# Altium PCB Sinistro_ASP_RevA.PcbDoc (part 5 of 5)
Units mm, origin at the board's own origin, x right, y up, seen from the top; angles counter-clockwise.
Board outline 150 x 110 mm, 8 copper layers (Top Layer (.GTL), MidLayer1 (.G1), +28V and VCC (.GP1), A and D grounds (.GP2), Earth GND (.GP3), +5ANA (.GP4), -5ANA (.GP5), Bottom Layer (.GBL)); 383 components, 275 nets, 1751 pads, 521 vias.
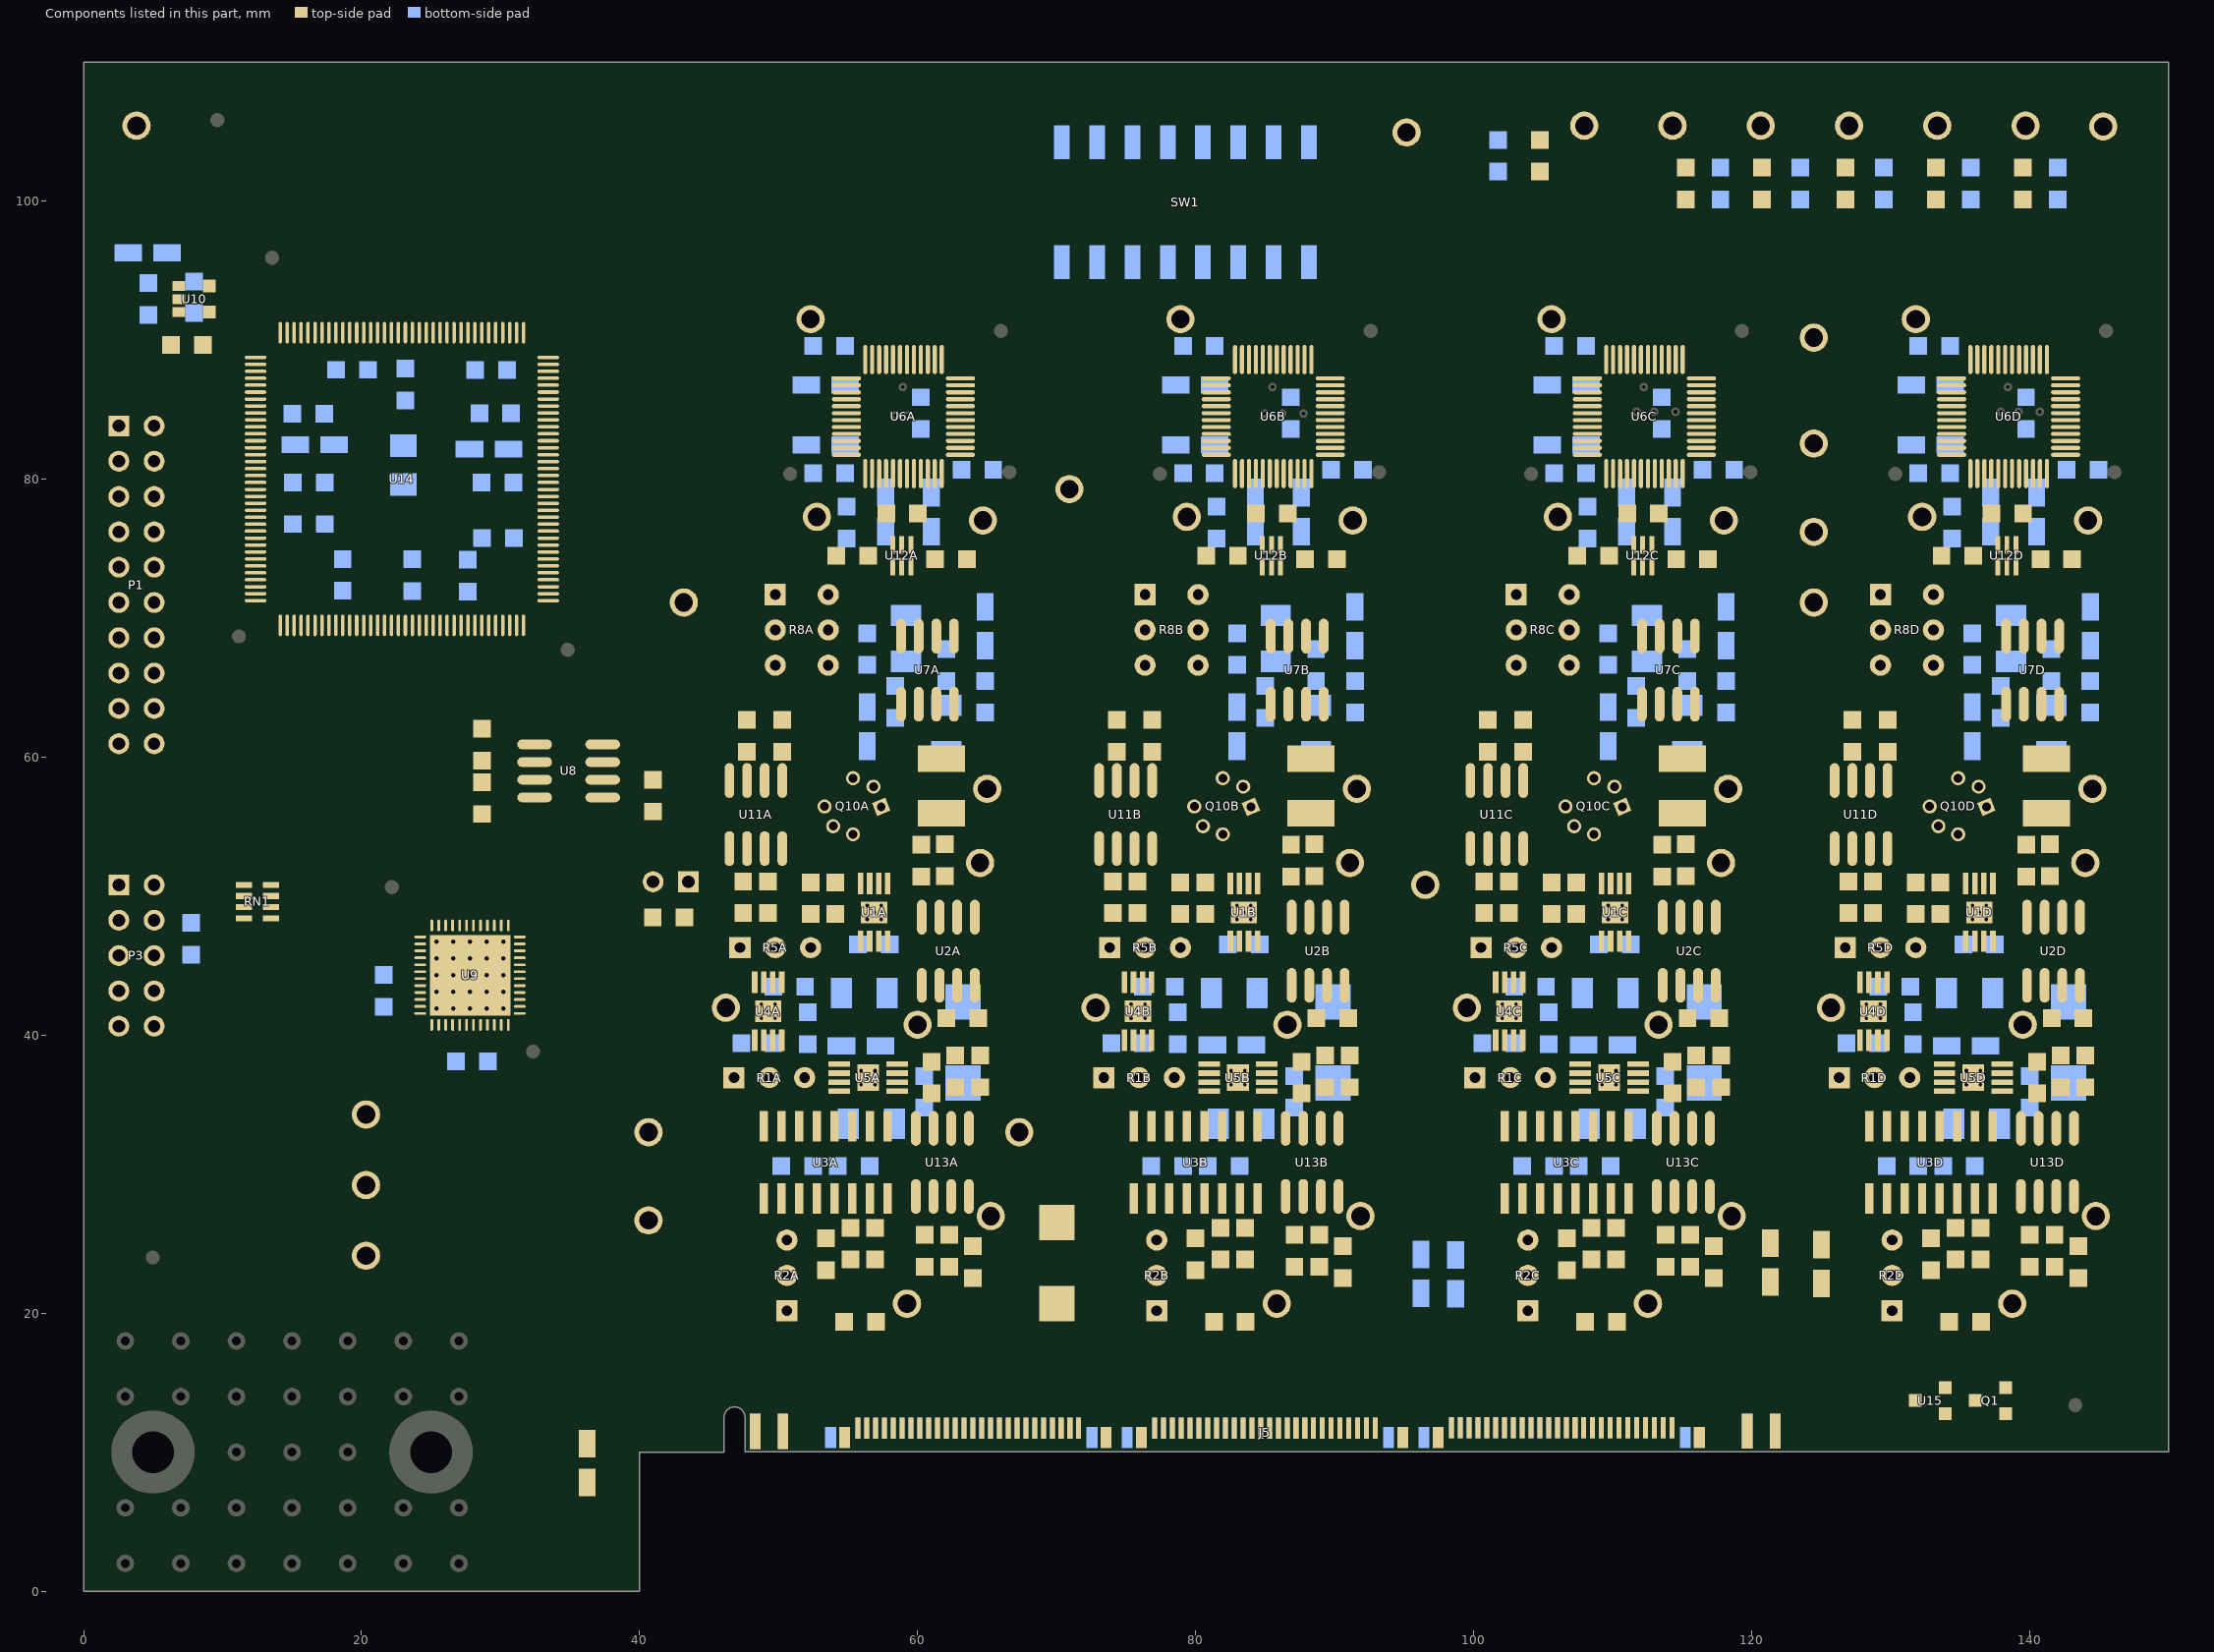
[diagram p11: the components of this part, seen from the top]

## Polygon pours and split planes (outlines as drawn)
E on Top Layer (.GTL) "Mechanical 13-No Net" (solid, pour order 1003): 135.888,87.122 135.888,81.915 141.056,81.915 141.174,82.032 141.023,82.183 141.023,87.056
E on Top Layer (.GTL) "Mechanical 13-No Net" (solid, pour order 1002): 109.688,87.122 109.688,81.915 114.856,81.915 114.974,82.032 114.823,82.183 114.823,87.056
E on Top Layer (.GTL) "Mechanical 13-No Net" (solid, pour order 1001): 82.988,87.122 82.988,81.915 88.156,81.915 88.274,82.032 88.123,82.183 88.123,87.056
E on Top Layer (.GTL) "Mechanical 13-No Net" (solid, pour order 1000): 56.388,87.122 56.388,81.915 61.556,81.915 61.674,82.032 61.523,82.183 61.523,87.056
no net on Top Solder "Mechanical 13-No Net" (solid): 56.39,87.122 56.39,81.788 61.724,81.788 61.724,87.122
no net on Top Solder "Mechanical 13-No Net" (solid): 82.99,87.122 82.99,81.788 88.324,81.788 88.324,87.122
no net on Top Solder "Mechanical 13-No Net" (solid): 109.69,87.122 109.69,81.788 115.024,81.788 115.024,87.122
E on Top Solder "Mechanical 13-No Net" (solid): 135.89,87.122 135.89,81.788 141.224,81.788 141.224,87.122
+28V on +28V and VCC (.GP1) (split plane): 149.298,50.677 149.438,50.654 149.49,50.651 149.49,10.531 48.237,10.531 48.237,50.696 149.232,50.696
VCC on +28V and VCC (.GP1) (split plane): 149.49,53.24 46.965,53.24 46.822,53.232 46.682,53.209 46.544,53.169 46.413,53.114 46.288,53.045 46.172,52.963 46.065,52.868 45.97,52.761 45.888,52.645 45.819,52.52 45.764,52.389 45.724,52.251 45.701,52.111 45.693,51.968 45.693,13.043 45.64,12.916 45.601,12.78 45.577,12.641 45.57,12.511 45.569,12.5 45.569,10.51 40,10.51 39.9,10.501 39.805,10.472 39.716,10.424 39.639,10.361 39.576,10.284 39.528,10.195 39.499,10.1 39.49,10 39.49,0.51 0.51,0.51 0.51,109.49 149.49,109.49
A on A and D grounds (.GP2) (split plane): 149.49,18.442 42.648,18.442 42.648,53.467 42.641,53.542 42.619,53.614 42.584,53.68 42.536,53.738 42.508,53.761 42.486,53.789 42.427,53.836 42.361,53.872 42.289,53.893 42.215,53.901 24.792,53.901 24.792,65.149 42.316,65.149 42.391,65.157 42.463,65.178 42.529,65.214 42.587,65.261 42.633,65.317 42.689,65.363 42.736,65.421 42.772,65.487 42.793,65.559 42.801,65.634 42.801,109.169 42.793,109.244 42.772,109.316 42.736,109.382 42.689,109.44 42.631,109.488 42.627,109.49 149.49,109.49
GND on A and D grounds (.GP2) (split plane): 42.205,109.488 42.147,109.44 42.1,109.382 42.064,109.316 42.043,109.244 42.035,109.169 42.035,65.915 24.46,65.915 24.386,65.907 24.314,65.886 24.248,65.85 24.189,65.803 24.167,65.775 24.139,65.752 24.091,65.694 24.056,65.628 24.034,65.556 24.027,65.481 24.027,53.569 24.034,53.494 24.056,53.422 24.091,53.356 24.139,53.298 24.167,53.275 24.189,53.247 24.248,53.199 24.314,53.164 24.386,53.142 24.46,53.135 41.883,53.135 41.883,18.059 41.89,17.985 41.912,17.913 41.947,17.847 41.995,17.789 42.053,17.741 42.119,17.706 42.191,17.684 42.266,17.677 149.49,17.677 149.49,10.531 48.09,10.531 48.09,12.5 48.089,12.511 48.082,12.641 48.058,12.78 48.019,12.916 47.965,13.047 47.896,13.17 47.815,13.286 47.72,13.391 47.615,13.485 47.5,13.567 47.376,13.635 47.246,13.689 47.11,13.728 46.971,13.752 46.829,13.76 46.688,13.752 46.549,13.728 46.413,13.689 46.283,13.635 46.159,13.567 46.044,13.485 45.938,13.391 45.844,13.286 45.763,13.17 45.694,13.047 45.64,12.916 45.601,12.78 45.577,12.641 45.57,12.511 45.569,12.5 45.569,10.51 40,10.51 39.9,10.501 39.805,10.472 39.716,10.424 39.639,10.361 39.576,10.284 39.528,10.195 39.499,10.1 39.49,10 39.49,0.51 0.51,0.51 0.51,109.49 42.209,109.49
E on Earth GND (.GP3) (split plane): 149.49,10.531 48.09,10.531 48.09,12.5 48.089,12.511 48.082,12.641 48.058,12.78 48.019,12.916 47.965,13.047 47.896,13.17 47.815,13.286 47.72,13.391 47.615,13.485 47.5,13.567 47.376,13.635 47.246,13.689 47.11,13.728 46.971,13.752 46.829,13.76 46.688,13.752 46.549,13.728 46.413,13.689 46.283,13.635 46.159,13.567 46.044,13.485 45.938,13.391 45.844,13.286 45.763,13.17 45.694,13.047 45.64,12.916 45.601,12.78 45.577,12.641 45.57,12.511 45.569,12.5 45.569,10.51 40,10.51 39.9,10.501 39.805,10.472 39.716,10.424 39.639,10.361 39.576,10.284 39.528,10.195 39.499,10.1 39.49,10 39.49,0.51 0.51,0.51 0.51,109.49 149.49,109.49
+5ANA on +5ANA (.GP4) (split plane): 149.49,10.531 48.09,10.531 48.09,12.5 48.089,12.511 48.082,12.641 48.058,12.78 48.019,12.916 47.965,13.047 47.896,13.17 47.815,13.286 47.72,13.391 47.615,13.485 47.5,13.567 47.376,13.635 47.246,13.689 47.11,13.728 46.971,13.752 46.829,13.76 46.688,13.752 46.549,13.728 46.413,13.689 46.283,13.635 46.159,13.567 46.044,13.485 45.938,13.391 45.844,13.286 45.763,13.17 45.694,13.047 45.64,12.916 45.601,12.78 45.577,12.641 45.57,12.511 45.569,12.5 45.569,10.51 40,10.51 39.9,10.501 39.805,10.472 39.716,10.424 39.639,10.361 39.576,10.284 39.528,10.195 39.499,10.1 39.49,10 39.49,0.51 0.51,0.51 0.51,109.49 149.49,109.49
-5ANA on -5ANA (.GP5) (split plane): 149.49,10.531 48.09,10.531 48.09,12.5 48.089,12.511 48.082,12.641 48.058,12.78 48.019,12.916 47.965,13.047 47.896,13.17 47.815,13.286 47.72,13.391 47.615,13.485 47.5,13.567 47.376,13.635 47.246,13.689 47.11,13.728 46.971,13.752 46.829,13.76 46.688,13.752 46.549,13.728 46.413,13.689 46.283,13.635 46.159,13.567 46.044,13.485 45.938,13.391 45.844,13.286 45.763,13.17 45.694,13.047 45.64,12.916 45.601,12.78 45.577,12.641 45.57,12.511 45.569,12.5 45.569,10.51 40,10.51 39.9,10.501 39.805,10.472 39.716,10.424 39.639,10.361 39.576,10.284 39.528,10.195 39.499,10.1 39.49,10 39.49,0.51 0.51,0.51 0.51,109.49 149.49,109.49

## Other copper
Top Layer (.GTL):
  rectangle net E: 0,0 30,20
  text "*.GTL - TOP LAYER GERBER DATA" at 27.94,-41.148 h2.03
MidLayer1 (.G1):
  text "*.G1 - MID LAYER 1 GERBER DATA" at 27.94,-45.972 h2.03
Bottom Layer (.GBL):
  region net E: 30,20 0,20 0,0 30,0
  text "SINISTRO ASP BOARD Rev.A" at 63.8,107.6 h0.76
  text "Las Cumbres Observatory" at 63.5,106 h0.76
  text "*.GBL - BOTTOM LAYER GERBER DATA" at 27.94,-74.916 h2.03
A and D grounds (.GP2) (plane layer: these items are gaps in the copper):
  lines w0.762: 24.409,53.569 24.409,65.481 ; 24.46,53.518 42.215,53.518 ; 24.46,65.532 42.316,65.532 ; 42.266,53.467 42.266,18.059 149.924,18.059 ; 42.418,65.634 42.418,109.169
  text "*.GP2 - INTERNAL PLANE LAYER 2 GERBER DATA" at 27.94,-55.62 h2.03
+5ANA (.GP4) (plane layer: these items are gaps in the copper):
  text "*.GP4 - INTERNAL PLANE LAYER 4 GERBER DATA" at 27.94,-65.268 h2.03
-5ANA (.GP5) (plane layer: these items are gaps in the copper):
  text "*.GP5 - INTERNAL PLANE LAYER 5 GERBER DATA" at 27.94,-70.092 h2.03
+28V and VCC (.GP1) (plane layer: these items are gaps in the copper):
  lines w2.54: 46.965,10.16 46.965,51.968 141.808,51.968 149.53,51.968 149.581,51.918
  text "*.GP1- INTERNAL PLANE LAYER 1 GERBER DATA" at 27.94,-50.796 h2.03
Earth GND (.GP3) (plane layer: these items are gaps in the copper):
  text "*.GP3- INTERNAL PLANE LAYER 3 GERBER DATA" at 27.94,-60.444 h2.03

## Silkscreen, mask and mechanical layers (free items; w line width, h text height)
Top Overlay:
  rectangle: 20.625,55.702 26.721,59.893
  text "+5ANA" at 125.4,108.8 h0.76
  text "+12V" at 113,108.7 h0.76
  text "-12V" at 119.3,108.7 h0.76
  text "-5ANA" at 131.4,108.7 h0.76
  text "VCC" at 138.7,108.7 h0.76
  text "+28V" at 106.3,108.5 h0.76
  text "AGND" at 94.1,106.9 h0.76
  text "DGND" at 2.6,102.6 h0.76
  text "AGND" at 144.1,102.5 h0.76
  text "AGND" at 69.5,80.9 h0.76
  text "/CONVST" at 122,80.3 h0.76
  text "ASP BOARD" at 9.5,60.909 h1.52
  text "SCH Rev" at 9.398,57.023 h1.52
  text "DGND" at 39.1,52.6 h0.76
  text "AGND" at 42.8,52.6 h0.76
  text "AGND" at 95,48.3 h0.76
  text "JTAG" at 1.905,34.925 h1.27
  text "/RST BLK" at 35.7,34.5 h0.76
  text "SCLK" at 15.4,34.1 h0.76
  text "DC HOLD" at 67.5,30.9 h0.76
  text "SIMO" at 15.6,28.8 h0.76
  text "/GAIN 4X" at 35.1,28.1 h0.76
  text "SOMI" at 15.5,23.7 h0.76
  text "*.GTO - TOP OVERLAY GERBER DATA" at 27.94,-94.213 h2.03
Bottom Overlay:
  text "*GBO BOTTOM OVERLAY GERBER DATA" at 27.94,-79.74 h2.03
Top Paste:
  text "*.GTP - TOP-SIDE SOLDER PASTE MASK" at 27.94,-99.037 h2.03
Bottom Paste:
  text "*.GBP - BOTTOM-SIDE SOLDER PASTE MASK" at 27.94,-84.565 h2.03
Top Solder:
  rectangle: 0,0 30,20
  text "*.GTS - TOP SOLDER MASK GERBER DATA" at 27.94,-103.861 h2.03
Bottom Solder:
  rectangle: 0,0 30,20
  text "*.GBS - BOTTOM SOLDER MASK GERBER DATA" at 27.94,-89.388 h2.03
Mechanical 1:
  lines w0.75: 47.579,12.5 47.579,12.5 47.579,10.021 128.979,10.021 150,10.021 150,110 30,110 0,110 0,0 30,0 40,0 40,10 46.079,10 46.079,12.5 cw(c46.829,12.522) 47.58,12.522
Mechanical 2:
  lines w0.254: -200.355,-195.25 333.045,-195.25 333.045,211.15 -200.355,211.15 -200.355,-195.25 ; 230.048,-192.557 ccw(c231.318,-192.557) 231.318,-193.827 239.7,-193.827 ccw(c239.7,-192.811) 240.716,-192.811 240.716,-188.493 ccw(c239.7,-188.493) 239.7,-187.477 230.048,-187.477 230.048,-192.557 ; 230.048,-185.191 ccw(c231.318,-185.191) 231.318,-186.461 330.378,-186.461 ccw(c330.378,-185.191) 331.648,-185.191 331.648,-180.365 ccw(c330.378,-180.365) 330.378,-179.095 230.048,-179.095 230.048,-185.191 ; 230.048,-176.809 ccw(c231.318,-176.809) 231.318,-178.079 279.07,-178.079 ccw(c279.07,-176.809) 280.34,-176.809 280.34,-172.999 ccw(c279.07,-172.999) 279.07,-171.729 230.048,-171.729 230.048,-176.809 ; 230.048,-169.697 ccw(c231.064,-169.697) 231.064,-170.713 251.638,-170.713 ccw(c251.638,-169.443) 252.908,-169.443 252.908,-165.633 ccw(c251.638,-165.633) 251.638,-164.363 230.048,-164.363 230.048,-169.697 ; 241.732,-192.811 ccw(c242.748,-192.811) 242.748,-193.827 292.532,-193.827 ccw(c292.532,-192.811) 293.548,-192.811 293.548,-188.493 ccw(c292.532,-188.493) 292.532,-187.477 241.732,-187.477 241.732,-192.811 ; 253.924,-169.443 ccw(c255.194,-169.443) 255.194,-170.713 279.07,-170.713 ccw(c279.07,-169.443) 280.34,-169.443 280.34,-165.633 ccw(c279.07,-165.633) 279.07,-164.363 253.924,-164.363 253.924,-169.443 ; 281.356,-176.809 ccw(c282.626,-176.809) 282.626,-178.079 330.378,-178.079 ccw(c330.378,-176.809) 331.648,-176.809 331.648,-172.999 ccw(c330.378,-172.999) 330.378,-171.729 281.356,-171.729 281.356,-176.809 ; 281.356,-169.443 ccw(c282.626,-169.443) 282.626,-170.713 306.502,-170.713 ccw(c306.502,-169.443) 307.772,-169.443 307.772,-165.633 ccw(c306.502,-165.633) 306.502,-164.363 281.356,-164.363 281.356,-169.443 ; 294.564,-192.557 ccw(c295.834,-192.557) 295.834,-193.827 304.216,-193.827 ccw(c304.216,-192.811) 305.232,-192.811 305.232,-188.493 ccw(c304.216,-188.493) 304.216,-187.477 294.564,-187.477 294.564,-192.557 ; 306.248,-192.811 ccw(c307.264,-192.811) 307.264,-193.827 330.378,-193.827 ccw(c330.378,-192.557) 331.648,-192.557 331.648,-188.747 ccw(c330.378,-188.747) 330.378,-187.477 306.248,-187.477 306.248,-192.811 ; 308.788,-169.443 ccw(c310.058,-169.443) 310.058,-170.713 330.378,-170.713 ccw(c330.378,-169.443) 331.648,-169.443 331.648,-165.633 ccw(c330.378,-165.633) 330.378,-164.363 308.788,-164.363 308.788,-169.443
  lines w0.381: -183.566,-65.921 -59.08,-65.921 ; -183.566,-58.875 -59.08,-58.875 ; -185.09,-121.107 ccw(c-182.804,-121.107) -182.804,-123.393 -59.842,-123.393 ccw(c-59.842,-121.107) -57.556,-121.107 -57.556,-54.077 ccw(c-59.842,-54.077) -59.842,-51.791 -182.804,-51.791 ccw(c-182.804,-54.077) -185.09,-54.077 -185.09,-121.107
  lines w0.508: -199.846,-178.845 cw(c-198.577,-180.746) -198.577,-178.46 -186.893,-178.46 cw(c-186.893,-180.746) -184.607,-180.746 -184.607,-182.016 ccw(c-184.353,-182.016) -184.353,-182.27 -117.297,-182.27 cw(c-117.297,-184.556) -115.011,-184.556 -115.011,-193.192 cw(c-117.297,-193.192) -115.395,-194.461 ; 228.935,-194.843 cw(c231.318,-192.557) 228.016,-192.557 228.016,-150.139 cw(c231.318,-150.139) 231.318,-146.837 330.378,-146.837 cw(c330.378,-150.139) 332.63,-147.724 ; -199.847,-193.192 ccw(c-198.577,-193.192) -198.577,-194.462 -117.297,-194.462 ccw(c-117.297,-193.192) -116.027,-193.192 -116.027,-184.556 ccw(c-117.297,-184.556) -117.297,-183.286 -184.353,-183.286 cw(c-184.353,-182.016) -185.623,-182.016 -185.623,-180.746 ccw(c-186.893,-180.746) -186.893,-179.476 -198.577,-179.476 ccw(c-198.577,-180.746) -199.847,-180.746 -199.847,-193.192 ; -9.093,-190.678 ccw(c-5.791,-190.678) -5.791,-193.98 114.605,-193.98 ccw(c114.605,-190.678) 117.907,-190.678 117.907,-150.292 ccw(c114.605,-150.292) 114.605,-146.99 -5.791,-146.99 ccw(c-5.791,-150.292) -9.093,-150.292 -9.093,-190.678 ; 229.032,-192.557 ccw(c231.318,-192.557) 231.318,-194.843 330.378,-194.843 ccw(c330.378,-192.557) 332.664,-192.557 332.664,-150.139 ccw(c330.378,-150.139) 330.378,-147.853 231.318,-147.853 ccw(c231.318,-150.139) 229.032,-150.139 229.032,-192.557
  lines w0.61: 55.677,-189.916 59.487,-189.916 ; 55.677,-183.566 59.487,-183.566 ; 55.677,-177.216 59.487,-177.216 ; 55.677,-170.866 59.487,-170.866 ; 55.677,-164.516 59.487,-164.516
  lines w0.762: -213.055,-207.95 345.745,-207.95 345.745,223.85 -213.055,223.85 -213.055,-207.95
  lines w1.27: 233.731,-160.579 275.641,-160.579 ; 233.731,-150.927 275.641,-150.927 ; 275.641,-160.579 233.477,-160.579 233.477,-150.927 275.641,-150.927 ; 275.641,-160.579 275.641,-150.927
  text "NOTES (UNLESS OTHERWISE SPECIFIED):" at -192.227,197.841 h2.29
  text "GENERAL" at -189.687,192.761 h2.29
  text "1)" at -187.147,187.679 h1.91
  text "PCB IS 8-LAYER, .062\" THICK." at -182.067,187.68 h1.91
  text "2)" at -187.147,183.869 h1.91
  text "CONSTRUCTION IS SOLDER-MASK-OVER-BARE-COPPER (SMOBC)." at -182.067,183.869 h1.91
  text "3)" at -187.147,180.059 h1.91
  text "ACCEPTABILITY SHALL BE BASED ON IPC-A-600, CLASS 2." at -182.067,180.059 h1.91
  text "4)" at -187.147,176.249 h1.91
  text "THE FOLLOWING GERBER RS274X PHOTO TOOL FILES SHALL BE USED TO DEFINE ALL CIRCUIT FEATURES:" at -182.067,176.249 h1.91
  text "*.GTL - TOP LAYER GERBER DATA" at -181.28,169.748 h2.03
  text "*.G1 - MID LAYER 1 GERBER DATA" at -181.28,165.179 h2.03
  text "*.GP1- INTERNAL PLANE LAYER 1 GERBER DATA" at -181.28,159.933 h2.03
  text "*.GP2 - INTERNAL PLANE LAYER 2 GERBER DATA" at -181.28,155.365 h2.03
  text "*.GP3- INTERNAL PLANE LAYER 3 GERBER DATA" at -181.28,150.796 h2.03
  text "*.GP4 - INTERNAL PLANE LAYER 4 GERBER DATA" at -181.28,146.227 h2.03
  text "*.GP5 - INTERNAL PLANE LAYER 5 GERBER DATA" at -181.28,141.658 h2.03
  text "*.GBL - BOTTOM LAYER GERBER DATA" at -181.28,137.09 h2.03
  text "*GBO BOTTOM OVERLAY GERBER DATA" at -181.28,132.521 h2.03
  text "*.GBP - BOTTOM-SIDE SOLDER PASTE MASK" at -181.28,127.952 h2.03
  text "*.GBS - BOTTOM SOLDER MASK GERBER DATA" at -181.28,123.383 h2.03
  text "*.GTO - TOP OVERLAY GERBER DATA" at -181.28,118.815 h2.03
  text "*.GTP - TOP-SIDE SOLDER PASTE MASK" at -181.28,114.246 h2.03
  text "*.GTS - TOP SOLDER MASK GERBER DATA" at -181,109.677 h2.03
  text "5)" at -188.722,101.327 h1.91
  text "THE PHOTO TOOL SHALL NOT BE COMPENSATED WITHOUT PRIOR ENGINEERING APPROVAL." at -183.642,101.327 h1.91
  text "PCB DESIGNER: RICH LOBDILL   PH (805) 880-1621  FAX (805) 961-1792." at -183.642,97.518 h1.91
  text "FABRICATION TOLERANCES" at -188.214,90.094 h2.29
  text "6)" at -185.674,85.013 h1.91
  text "END PRODUCT CONDUCTOR WIDTHS AND PAD DIAMETERS SHALL NOT VARY MORE THAN" at -180.594,85.013 h1.91
  text "0.002\" FROM THE 1:1 DIMENSIONS OF THE MASTER ARTWORK." at -180.594,81.204 h1.91
  text "7)" at -185.674,77.393 h1.91
  text "THE CONDUCTIVE PATTERN SHALL BE POSITIONED SO THAT THE LOCATION OF ANY PAD OR" at -180.594,77.393 h1.91
  text "LAND SHALL BE WITHIN 0.005\" DIAMETER TO THE TRUE POSITION OF THE HOLE IT CIRCUMSCRIBES." at -180.594,73.584 h1.91
  text "8)" at -185.674,69.773 h1.91
  text "ALL DRILL HOLE SIZES AND TOLERANCES APPLY AFTER PLATING." at -180.594,69.773 h1.91
  text "9)" at -185.674,65.963 h1.91
  text "THE MINIMUM ANNULAR RING SHALL BE 0.005\"." at -180.594,65.963 h1.91
  text "10)" at -187.071,62.153 h1.91
  text "BOW AND TWIST SHALL NOT EXCEED 0.010\" PER INCH." at -180.594,62.153 h1.91
  text "11)" at -186.817,58.343 h1.91
  text "FOR PCB ROUTING DIMENSIONS: .XXX = +/-.005\"  .XX = +/-.020\"" at -180.594,58.343 h1.91
  text "MATERIAL" at -188.214,53.264 h2.29
  text "12)" at -187.071,48.183 h1.91
  text "BASE MATERIAL IS FR4 EPOXY FIBERGLASS" at -180.416,48.031 h1.91
  text "SEE STACK-UP LEGEND FOR COPPER CLADDING CALL OUTS" at -180.416,44.475 h1.91
  text "13)" at -187.071,44.373 h1.91
  text "PLATING" at -188.214,39.294 h2.29
  text "14)" at -187.071,34.34 h1.91
  text "ALL HOLES AND CONDUCTIVE SURFACES SHALL BE PLATED WITH A MINIMUM OF 0.001\" COPPER." at -180.594,34.34 h1.91
  text "15)" at -187.071,30.53 h1.91
  text "AFTER SOLDERMASK, ALL EXPOSED HOLES AND CONDUCTIVE SURFACES SHALL BE COATED" at -180.594,30.53 h1.91
  text "WITH A GOLD IMMERSION PLATING TO PRESERVE SOLDERABILITY." at -180.416,26.695 h1.91
  text "COATINGS" at -188.214,21.641 h2.29
  text "16)" at -186.944,16.687 h1.91
  text "THE SOLDERMASK SHALL BE BLACK LIQUID PHOTO-IMAGEABLE PER IPC-SM-840, TYPE-B, CLASS 2." at -180.594,16.687 h1.91
  text "17)" at -187.071,12.877 h1.91
  text "THE SOLDERMASK REGISTRATION ALLOWANCE IS 0.003\".  THERE SHALL BE NO SOLDERMASK ON" at -180.594,12.877 h1.91
  text "ANY SOLDER PAD OR LAND." at -180.594,9.067 h1.91
  text "MARKING" at -188.214,3.988 h2.29
  text "18)" at -187.071,-0.966 h1.91
  text "THE LEGEND SHALL BE SCREEN-PRINTED USING PERMANENT YELLOW EPOXY INK." at -180.594,-0.966 h1.91
  text "19)" at -187.071,-4.776 h1.91
  text "THE SCREEN PRINTING REGISTRATION ALLOWANCE IS 0.007\".  THERE SHALL BE NO INK ON ANY" at -180.594,-4.776 h1.91
  text "SOLDER PAD OR LAND." at -180.594,-8.585 h1.91
  text "20)" at -187.325,-12.396 h1.91
  text "THE VENDOR CODE AND UL FLAMMABILITY RATING MAY BE ETCHED IN THE FOIL OR MARKED IN" at -180.594,-12.396 h1.91
  text "PERMANENT EPOXY INK (VENDOR'S OPTION)." at -180.594,-16.205 h1.91
  text "ELECTRICAL TESTING" at -188.214,-21.285 h2.29
  text "21)" at -187.071,-26.239 h1.91
  text "ALL BOARDS SHALL BE ELECTRICALLY TESTED TO THE SUPPLIED IPC-D-356A NET LIST" at -180.594,-26.239 h1.91
  text "FOR CONTINUITY, OPENS AND SHORTS." at -180.594,-30.048 h1.91
  text "Layer Stack Up Detail for: Sinistro_ASP_RevA.PcbDoc" at -183.566,-57.052 h2.39
  text "Layer" at -183.566,-61.504 h1.63
  text "Copper cladding" at -104.597,-63.17 h1.91
  text "Name" at -183.566,-64.755 h1.63
  text "Top Layer (.GTL)" at -183.566,-69.374 h2.29
  text "1/2 oz (1 oz finished)" at -114.046,-70.129 h2.29
  text "MidLayer1 (.G1)" at -183.566,-75.899 h2.29
  text "1/2 oz" at -113.817,-76.2 h2.29
  text "+28V and VCC (.GP1)" at -183.566,-82.424 h2.29
  text "1/2 oz" at -114.376,-82.702 h2.29
  text "2 oz" at -118.593,-88.671 h2.29
  text "A and D grounds (.GP2)" at -183.566,-88.95 h2.29
  text "2 oz" at -118.923,-94.742 h2.29
  text "Earth GND (.GP3)" at -183.566,-95.475 h2.29
  text "1/2 oz" at -115.341,-101.371 h2.29
  text "+5ANA (.GP4)" at -183.566,-102 h2.29
  text "1/2 oz" at -115.138,-108.306 h2.29
  text "-5ANA (.GP5)" at -183.566,-108.525 h2.29
  text "Bottom Layer (.GBL)" at -183.566,-115.051 h2.29
  text "1/2 oz (1 oz finished)" at -115.443,-115.341 h2.29
  text "Las Cumbres Observatory, Inc." at 279.959,-151.435 h2.29
  text "Las Cumbres Observatory" at 235.001,-154.483 h3.81
  text "PRIMARY PCB SPECIFICATIONS" at 2.261,-154.864 h5.08
  text "6740 Cortona Dr." at 291.135,-155.346 h2.29
  text "Global Telescope Network" at 239.065,-158.547 h3.17
  text "Goleta, CA 93117" at 289.865,-159.156 h2.29
  text "(REFER TO COMPLETE SPEC LISTING AT LEFT FOR FURTHER DETAILS)" at -6.553,-160.071 h2.54
  text "www.lcogt.net" at 293.421,-162.865 h2.29
  text "DATE" at 230.556,-165.679 h0.81
  text "DESIGNED" at 254.432,-165.679 h0.81
  text "DRAWN" at 281.864,-165.679 h0.81
  text "SCALE" at 309.296,-165.679 h0.81
  text "NUMBER OF LAYERS" at -4.013,-166.421 h3.81
  text "8" at 86.157,-166.421 h3.81
  text "Rich Lobdill" at 289.611,-168.199 h1.4
  text "Rich Lobdill" at 261.036,-168.326 h1.4
  text "1 : 1" at 316.535,-168.681 h2.29
  text "6/2/2009" at 231.318,-168.859 h2.29
  text "FINISHED THICKNESS" at -4.013,-172.771 h3.81
  text ".062\"" at 81.712,-172.771 h3.81
  text "CHECKED/DATE" at 230.556,-173.045 h0.81
  text "APPROVED/DATE" at 281.864,-173.045 h0.81
  text "BASE MATERIAL" at -4.013,-179.121 h3.81
  text "FR4" at 79.807,-179.121 h3.81
  text "TITLE" at 230.556,-180.411 h0.81
  text "NOTICE" at -198.45,-183.159 h2.54
  text "ASP BOARD" at 236.144,-184.074 h2.54
  text "GOLD IMMERSION" at 67.259,-184.633 h3.81
  text "PLATING TYPE" at -4.013,-185.471 h3.81
  text "THIS DRAWING EMBODIES A PROPRIETARY DESIGN OWNED BY LAS CUMBRES" at -197.561,-186.08 h1.52
  text "OBSERVATORY.  IT IS SUBMITTED FOR A SPECIFIC PURPOSE UNDER A CON-" at -197.561,-188.62 h1.52
  text "SIZE" at 230.556,-188.793 h0.81
  text "DOC NO." at 242.24,-188.793 h0.81
  text "REV" at 295.072,-188.793 h0.81
  text "SHEET" at 306.756,-188.793 h0.81
  text "FIDENTIAL RELATIONSHIP, AND EXCEPT FOR PURPOSES EXPRESSLY GRANTED" at -197.561,-191.033 h1.52
  text "OF" at 317.678,-191.414 h1.52
  text "SOLDER MASK COLOR" at -4.013,-191.821 h3.81
  text "BLACK" at 82.982,-191.821 h3.81
  text "1" at 313.36,-191.922 h2.54
  text "14" at 323.52,-191.922 h2.54
  text "A" at 298.755,-192.253 h3.3
  text "-" at 256.337,-192.303 h3.3
  text "GPT" at 274.618,-192.679 h3.3
  text "C" at 233.985,-192.71 h2.54
  text "IN WRITING, ALL RIGHTS ARE RESERVED BY LAS CUMBRES OBSERVATORY." at -197.561,-193.319 h1.52
Mechanical 5:
  text "ASP BOARD Rev. A" at 34.85,-29.271 h2.03
  text "LAS CUMBRES OBSERVATORY     6/2/2009" at 34.85,-33.082 h2.03
Drill Drawing:
  lines w0.254: -200.355,-195.25 333.045,-195.25 333.045,211.15 -200.355,211.15 -200.355,-195.25 ; 230.048,-192.557 ccw(c231.318,-192.557) 231.318,-193.827 239.7,-193.827 ccw(c239.7,-192.811) 240.716,-192.811 240.716,-188.493 ccw(c239.7,-188.493) 239.7,-187.477 230.048,-187.477 230.048,-192.557 ; 230.048,-185.191 ccw(c231.318,-185.191) 231.318,-186.461 330.378,-186.461 ccw(c330.378,-185.191) 331.648,-185.191 331.648,-180.365 ccw(c330.378,-180.365) 330.378,-179.095 230.048,-179.095 230.048,-185.191 ; 230.048,-177.063 ccw(c231.064,-177.063) 231.064,-178.079 267.132,-178.079 ccw(c267.132,-176.809) 268.402,-176.809 268.402,-172.999 ccw(c267.132,-172.999) 267.132,-171.729 230.048,-171.729 230.048,-177.063 ; 241.732,-192.811 ccw(c242.748,-192.811) 242.748,-193.827 292.532,-193.827 ccw(c292.532,-192.811) 293.548,-192.811 293.548,-188.493 ccw(c292.532,-188.493) 292.532,-187.477 241.732,-187.477 241.732,-192.811 ; 269.418,-176.809 ccw(c270.688,-176.809) 270.688,-178.079 306.502,-178.079 ccw(c306.502,-176.809) 307.772,-176.809 307.772,-172.999 ccw(c306.502,-172.999) 306.502,-171.729 269.418,-171.729 269.418,-176.809 ; 294.564,-192.557 ccw(c295.834,-192.557) 295.834,-193.827 304.216,-193.827 ccw(c304.216,-192.811) 305.232,-192.811 305.232,-188.493 ccw(c304.216,-188.493) 304.216,-187.477 294.564,-187.477 294.564,-192.557 ; 306.248,-192.811 ccw(c307.264,-192.811) 307.264,-193.827 330.378,-193.827 ccw(c330.378,-192.557) 331.648,-192.557 331.648,-188.747 ccw(c330.378,-188.747) 330.378,-187.477 306.248,-187.477 306.248,-192.811 ; 308.788,-176.809 ccw(c310.058,-176.809) 310.058,-178.079 330.378,-178.079 ccw(c330.378,-176.809) 331.648,-176.809 331.648,-172.999 ccw(c330.378,-172.999) 330.378,-171.729 308.788,-171.729 308.788,-176.809
  lines w0.508: -199.719,-179.226 cw(c-198.45,-181.127) -198.45,-178.841 -186.766,-178.841 cw(c-186.766,-181.127) -184.48,-181.127 -184.48,-182.397 ccw(c-184.226,-182.397) -184.226,-182.651 -117.17,-182.651 cw(c-117.17,-184.937) -114.884,-184.937 -114.884,-193.573 cw(c-117.17,-193.573) -115.268,-194.842 ; 228.903,-194.809 cw(c231.318,-192.557) 228.016,-192.557 228.016,-171.729 cw(c230.048,-171.729) 230.048,-169.697 330.378,-169.697 cw(c330.378,-172.999) 332.63,-170.584 ; -199.72,-193.573 ccw(c-198.45,-193.573) -198.45,-194.843 -117.17,-194.843 ccw(c-117.17,-193.573) -115.9,-193.573 -115.9,-184.937 ccw(c-117.17,-184.937) -117.17,-183.667 -184.226,-183.667 cw(c-184.226,-182.397) -185.496,-182.397 -185.496,-181.127 ccw(c-186.766,-181.127) -186.766,-179.857 -198.45,-179.857 ccw(c-198.45,-181.127) -199.72,-181.127 -199.72,-193.573 ; 229.032,-192.557 ccw(c231.318,-192.557) 231.318,-194.843 330.378,-194.843 ccw(c330.378,-192.557) 332.664,-192.557 332.664,-172.999 ccw(c330.378,-172.999) 330.378,-170.713 230.048,-170.713 ccw(c230.048,-171.729) 229.032,-171.729 229.032,-192.557
  lines w0.762: -213.055,-207.95 345.745,-207.95 345.745,223.85 -213.055,223.85 -213.055,-207.95
  text ".Legend" at 190.449,91.948 h2.54
  text "DESIGNED" at 230.556,-173.045 h0.81
  text "DRAWN" at 269.926,-173.045 h0.81
  text "SCALE" at 309.296,-173.045 h0.81
  text "Rich Lobdill" at 242.9,-175.489 h1.4
  text "Rich Lobdill" at 282.55,-175.539 h1.4
  text "1 : 1" at 316.535,-176.047 h2.29
  text "TITLE" at 230.556,-180.411 h0.81
  text "NOTICE" at -198.323,-183.54 h2.54
  text "ASP BOARD" at 236.068,-184.074 h2.54
  text "THIS DRAWING EMBODIES A PROPRIETARY DESIGN OWNED BY LAS CUMBRES" at -197.434,-186.461 h1.52
  text "SIZE" at 230.556,-188.793 h0.81
  text "DOC NO." at 242.24,-188.793 h0.81
  text "REV" at 295.072,-188.793 h0.81
  text "SHEET" at 306.756,-188.793 h0.81
  text "OBSERVATORY.  IT IS SUBMITTED FOR A SPECIFIC PURPOSE UNDER A CON-" at -197.434,-189.001 h1.52
  text "FIDENTIAL RELATIONSHIP, AND EXCEPT FOR PURPOSES EXPRESSLY GRANTED" at -197.434,-191.414 h1.52
  text "OF" at 317.678,-191.414 h1.52
  text "2" at 312.979,-191.922 h2.54
  text "14" at 323.52,-191.922 h2.54
  text "-" at 256.337,-192.303 h3.3
  text "A" at 298.628,-192.303 h3.3
  text "C" at 233.985,-192.71 h3.05
  text "GD1" at 277.165,-192.71 h3.05
  text "IN WRITING, ALL RIGHTS ARE RESERVED BY LAS CUMBRES OBSERVATORY." at -197.434,-193.7 h1.52

## Dimensions
0,0 to 46.829,13.25 on Mechanical 2
0,111.5 to 150,111 on Mechanical 2
41.5,0 to 151,10 on Mechanical 2
0,0 to 40,-1.5 on Mechanical 2
-1.2,0 to 30,110 on Mechanical 2
44.5,12.5 to 38.5,10 on Mechanical 2
46.5,14 to 44.5,23 on Mechanical 2

## Text inside footprints (layer, text, board x,y; h text height)
Designator14: Top Layer (.GTL) "LCOGT" at 8.179,101.219 h2.54; Top Solder "LCOGT" at 8.179,101.219 h2.54
Designator38: Bottom Layer (.GBL) "2009" at 59.46,102.488 h1.52
J5: Top Overlay "PC07" at 48.768,13.462 h0.76 r90; Top Overlay "PC01" at 121.92,13.589 h0.76 r90; Top Overlay "155" at 56.007,14.351 h0.76 r90; Top Overlay "1" at 114.681,14.732 h0.76 r90
P1: Top Overlay "2" at 4.572,86.36 h1.27 r270; Top Overlay "1" at 2.032,86.36 h1.27 r270; Top Overlay "19" at 2.032,59.436 h1.27 r270; Top Overlay "20" at 4.572,59.436 h1.27 r270
P3: Top Overlay "2" at 4.572,53.34 h1.27 r270; Top Overlay "1" at 2.032,52.832 h1.27 r270; Top Overlay "9" at 2.032,39.116 h1.27 r270; Top Overlay "10" at 4.572,39.116 h1.27 r270
Q10A: Top Overlay "1" at 58.829,57.031 h1.02 r180
Q10B: Top Overlay "1" at 85.429,57.031 h1.02 r180
Q10C: Top Overlay "1" at 112.129,57.031 h1.02 r180
Q10D: Top Overlay "1" at 138.329,57.031 h1.02 r180